# Altium PCB VL812 USB3.0 .PcbDoc (part 1 of 2)
Units mil, origin at the board's own origin, x right, y up, seen from the top; angles counter-clockwise.
Board outline 3076.06 x 1594.49 mil, 2 copper layers (TOP, BOTTOM), stack 60.4 mil thick; 108 components, 81 nets, 357 pads, 473 vias.
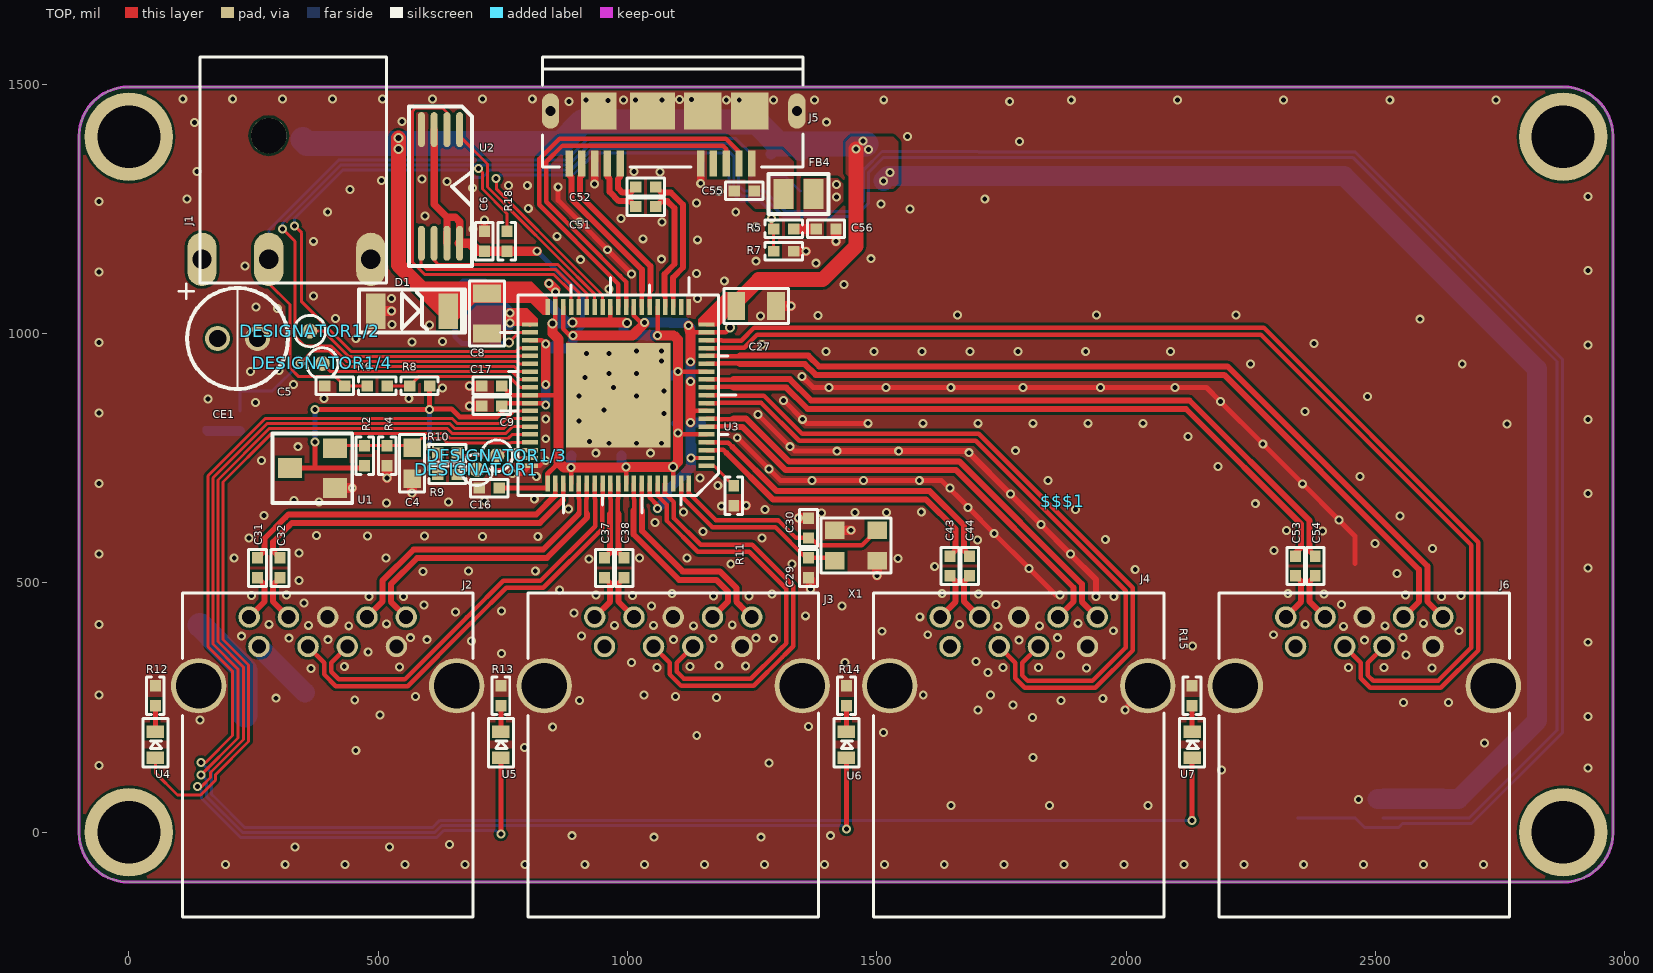
[diagram p0: TOP view]
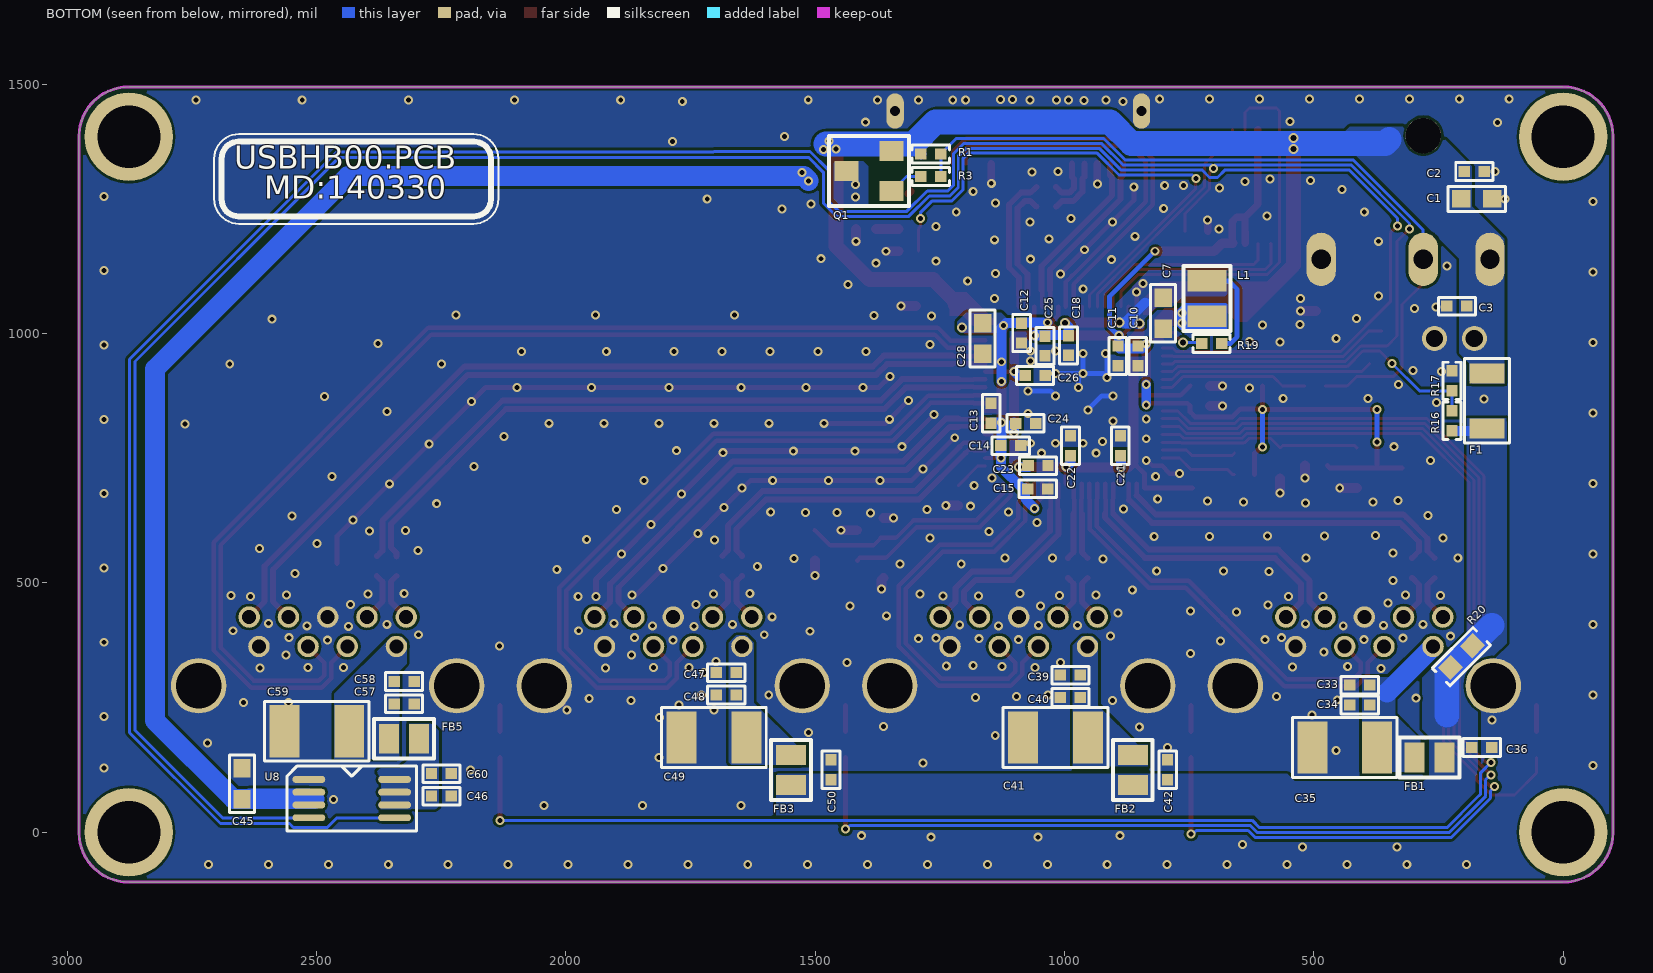
[diagram p1: BOTTOM view, seen from below]

## Layer stack, top to bottom
TOP: signal copper 1.2
Dielectric: dielectric 58, FR-4, Dk 1
BOTTOM: signal copper 1.2

## Board outline
-100,628.7 -100,1394.49 cw(c0,1394.49) 0,1494.49 171.06,1494.49 2876.06,1494.49 cw(c2876.06,1394.49) 2976.06,1394.49 2976.06,1278.7 2976.06,0 cw(c2876.06,0) 2876.06,-100 2671.06,-100 0,-100 cw(c0,0) -100,0 -100,143.7

## Design rules (kind name [scope] priority, off if disabled: settings)
Clearance "'Class' zsj rule_26" [InNetClass('USB3') And IsVia vs IsVia] p1: gap=12
Clearance "'Class' zsj rule_21" [InNetClass('USB2') And IsVia vs IsVia] p2: gap=12
Clearance "'Default' zsj rule_18" [All] p3: gap=5
Clearance "'Default' zsj rule_15" [IsVia vs IsVia] p4: gap=2
ComponentClearance "'Default' PADS rule_12" [All] p1: gap=2 collisioncheckmode=3 verticalgap=10 showdistances=FALSE
FlightTimeFalling "'Default' PADS rule_6" [All] p1: maximum=10.00
FlightTimeRising "'Default' PADS rule_5" [All] p1: maximum=10.00
Length "'Default' PADS rule" [All] p1: maxlimit=50000 minlimit=0
MatchedLengths "'Default' zsj  rule_7" [InNetClass('All Nets')] p1: tolerance=200 checknetsindiffpair=TRUE checkdiffpairvsdiffpair=TRUE checkothers=TRUE
MaxMinImpedance "'Default' PADS rule_4" [All] p1: minimum=50.00 maximum=150.0
MinimumSolderMaskSliver [All] p1: minsoldermaskwidth=5.04
ParallelSegment "'Default' zsj  rule_3" [All] p1: limit=1000 gap=200
ParallelSegment "'Default' zsj  rule_2" [All] p2: limit=1000 gap=200
PlaneClearance "'Class' zsj  rule_25" [InNetClass('USB3')] p1: clearance=5
PlaneClearance "'Class' zsj  rule_20" [InNetClass('USB2')] p2: clearance=5
PlaneClearance "'Net' zsj  rule_19" [InNetClass('Protel Created NetClass - 1')] p3: clearance=10
PlaneClearance "'Default' zsj  rule_14" [All] p4: clearance=8
PlaneConnect "Power Plane Connect Style - pads with no thermal" [(Name='J1-_')] p1: planeconnectstyle=NoConnect reliefexpansion=20 reliefentries=4 reliefconductorwidth=10 reliefairgap=10 // PAD - No Thermal Connect Rule
PlaneConnect "Power Plane Connect Style - from global settings" [All] p2: planeconnectstyle=Relief reliefexpansion=20 reliefentries=2 reliefconductorwidth=10 reliefairgap=10
PolygonConnect [All] p1: connectstyle=Direct reliefconductorwidth=10 reliefentries=4 polygonreliefangle="90 Angle"
RoutingLayers "'Default' zsj  rule_10" [All] p1: top layer_v5=TRUE bottom layer_v5=TRUE
RoutingPriority "'Default' zsj  rule_9" [All] p1: routingpriority=1
RoutingTopology "'Default' zsj  rule_8" [All] p1: topology=Shortest
RoutingVias "'Default' zsj rule_11" [All] p1: holewidth=12 width=20 viastyle="Through Hole" minholewidth=12 minwidth=20 maxholewidth=12 maxwidth=20
SMDToCorner "'Class' PADS rule_27" [InNetClass('USB3')] p1: distance=120000
SMDToCorner "'Class' PADS rule_22" [InNetClass('USB2')] p2: distance=120000
SMDToCorner "'Default' PADS rule_16" [All] p3: distance=20000
SMDToPlane "'Class' PADS rule_28" [InNetClass('USB3')] p1: distance=120000
SMDToPlane "'Class' PADS rule_23" [InNetClass('USB2')] p2: distance=120000
SMDToPlane "'Default' PADS rule_17" [All] p3: distance=20000
SilkToSilkClearance [All] p1: silktosilkclearance=0
SilkscreenOverComponentPads [IsPad] p1: minsilkscreentomaskgap=10
SolderMaskExpansion [All] p1: expansion=4
Width "'Class' zsj  rule_24" [InNetClass('USB3')] p1: maxlimit=12 minlimit=9 preferedwidth=12
Width "'Class' zsj  rule" [InNetClass('USB2')] p2: maxlimit=12 minlimit=9 preferedwidth=9
Width "'Net' zsj  rule" [InNetClass('Protel Created NetClass - 1')] p3: maxlimit=12 minlimit=9 preferedwidth=12
Width "'Default' zsj  rule_13" [All] p4: maxlimit=200 minlimit=5 preferedwidth=10
19 further rules are at their usual default settings.

## Classes and differential pairs
net class USB3: SSRX0+ SSRX0- SSRX1+ SSRX1- SSRX2+ SSRX2- SSRX3+ SSRX3- SSRX4+ SSRX4- SSTX0+ SSTX0+_E SSTX0- SSTX0-_E SSTX1+ SSTX1+_E SSTX1- SSTX1-_E SSTX2+ SSTX2+_E SSTX2- SSTX2-_E SSTX3+ SSTX3+_E SSTX3- SSTX3-_E SSTX4+ SSTX4+_E SSTX4- SSTX4-_E
net class USB2: USBDP+ USBDP- USBHP1+ USBHP1- USBHP2+ USBHP2- USBHP3+ USBHP3- USBHP4+ USBHP4-
net class "Protel Created NetClass - 1": SSRX0+ SSRX0- SSRX1+ SSRX1- SSRX2+ SSRX2- SSRX3+ SSRX3- SSRX4+ SSRX4- SSTX0+ SSTX0+_E SSTX0- SSTX0-_E SSTX1+ SSTX1+_E SSTX1- SSTX1-_E SSTX2+ SSTX2+_E SSTX2- SSTX2-_E SSTX3+ SSTX3+_E SSTX3- SSTX3-_E SSTX4+ SSTX4+_E SSTX4- SSTX4-_E USBDP+ USBDP- USBHP1+ USBHP1- USBHP2+ USBHP2- USBHP3+ USBHP3- USBHP4+ USBHP4-

## Components (designator, comment, footprint, x,y, rotation, side; value= is the part's Value field where it differs from the comment)
$$$1 "VIA_LABS_LOGO-5MM" VIA_LABS_LOGO-5MM 1872.95,665 r0 top
C1 "CAP0603/3" CAP0603/3 172.95,1270 r180 bottom
C2 "CAP0402/3" CAP0402/3 177.95,1325 r180 bottom
C3 "CAP0402/3" CAP0402/3 212.95,1055 r0 bottom
C4 "CAP0603" CAP0603 567.95,740 r90 top
C5 "CAP0402/2" CAP0402/2 412.95,895 r0 top
C6 "CAP0402" CAP0402 712.95,1185 r270 top
C7 "CAP0603/2" CAP0603/2 801.95,1041 r270 bottom
C8 "CAP0805/2" CAP0805/2 717.95,1040 r90 top
C9 "CAP0402/2" CAP0402/2 727.95,855 r0 top
C10 "CAP0402/4" CAP0402/4 852.95,955 r270 bottom
C11 "CAP0402/4" CAP0402/4 892.95,955 r270 bottom
C12 "CAP0402/4" CAP0402/4 1085.95,1001 r270 bottom
C13 "CAP0402/4" CAP0402/4 1146.95,840 r90 bottom
C14 "CAP0402/3" CAP0402/3 1107.95,775 r180 bottom
C15 "CAP0402/3" CAP0402/3 1053.74,688.7 r180 bottom
C16 "CAP0402/2" CAP0402/2 722.95,690 r0 top
C17 "CAP0402/2" CAP0402/2 727.95,895 r0 top
C18 "CAP0402/4" CAP0402/4 991.95,976 r270 bottom
C21 "CAP0402/4" CAP0402/4 887.95,775 r90 bottom
C22 "CAP0402/4" CAP0402/4 987.95,775 r90 bottom
C23 "CAP0402/3" CAP0402/3 1052.95,735 r180 bottom
C24 "CAP0402/3" CAP0402/3 1077.95,820 r180 bottom
C25 "CAP0402/4" CAP0402/4 1038.95,975 r270 bottom
C26 "CAP0402/3" CAP0402/3 1058.95,916 r180 bottom
C27 "CAP0805" CAP0805 1257.95,1055 r180 top
C28 "CAP0603/2" CAP0603/2 1163.95,990 r270 bottom
C29 "CAP0402" CAP0402 1362.95,530 r90 top
C30 "CAP0402" CAP0402 1362.95,610 r270 top
C31 "CAP0402" CAP0402 257.95,530 r270 top
C32 "CAP0402" CAP0402 302.95,530 r270 top
C33 "CAP0402/3" CAP0402/3 407.95,295 r0 bottom
C34 "CAP0402/3" CAP0402/3 407.95,255 r0 bottom
C35 "CAP1210" CAP1210 437.95,170 r0 bottom
C36 "CAP0402/3" CAP0402/3 162.95,170 r180 bottom
C37 "CAP0402" CAP0402 953.78,529.92 r270 top
C38 "CAP0402" CAP0402 993.15,529.92 r270 top
C39 "CAP0402/3" CAP0402/3 987.95,315 r0 bottom
C40 "CAP0402/3" CAP0402/3 987.95,270 r0 bottom
C41 "CAP1210" CAP1210 1017.95,190 r0 bottom
C42 "CAP0402/4" CAP0402/4 792.95,125 r90 bottom
C43 "CAP0402" CAP0402 1646.69,533.86 r270 top
C44 "CAP0402" CAP0402 1686.06,533.86 r270 top
C45 "CAP0603/2" CAP0603/2 2649.17,97.4 r90 bottom
C46 "CAP0402/3" CAP0402/3 2249.17,72.4 r180 bottom
C47 "CAP0402/3" CAP0402/3 1677.95,320 r0 bottom
C48 "CAP0402/3" CAP0402/3 1677.95,275 r0 bottom
C49 "CAP1210" CAP1210 1702.95,190 r0 bottom
C50 "CAP0402/4" CAP0402/4 1467.95,125 r90 bottom
C51 "CAP0402/2" CAP0402/2 1036.45,1254.33 r180 top
C52 "CAP0402/2" CAP0402/2 1036.45,1293.7 r180 top
C53 "CAP0402/2" CAP0402/2 2339.6,533.86 r270 top
C54 "CAP0402/2" CAP0402/2 2378.97,533.86 r270 top
C55 "CAP0402/2" CAP0402/2 1233.95,1286 r0 top
C56 "CAP0402/2" CAP0402/2 1397.95,1210 r180 top
C57 "CAP0402/3" CAP0402/3 2324.17,257.4 r180 bottom
C58 "CAP0402/3" CAP0402/3 2324.17,302.4 r180 bottom
C59 "CAP1210" CAP1210 2499.17,202.4 r0 bottom
C60 "CAP0402/3" CAP0402/3 2249.17,117.4 r180 bottom
CE1 "EC5X7-80" EC5X7-80 217.95,990 r0 top
D1 "D-MELF" D-MELF 567.95,1045 r180 top
DESIGNATOR1 "SMD_TP_1" SMD_TP_1 697.95,727 r135 top
DESIGNATOR1/2 "SMD_TP_1/2" SMD_TP_1/2 362.95,1005 r90 top
DESIGNATOR1/3 "SMD_TP_1/2" SMD_TP_1/2 737.95,755 r90 top
DESIGNATOR1/4 "SMD_TP_1/2" SMD_TP_1/2 387.95,940 r90 top
F1 "FUSE1206" FUSE1206 152.95,865 r270 bottom
FB1 "BEAD-CB-2012ES/3" BEAD-CB-2012ES/3 267.95,150 r0 bottom
FB2 "BEAD-CB-2012ES/2" BEAD-CB-2012ES/2 862.95,125 r90 bottom
FB3 "BEAD-CB-2012ES/2" BEAD-CB-2012ES/2 1547.95,125 r90 bottom
FB4 "BEAD-CB-2012ES" BEAD-CB-2012ES 1342.95,1280 r0 top
FB5 "BEAD-CB-2012ES/3" BEAD-CB-2012ES/3 2324.17,187.4 r0 bottom
J1 "DCJACK-IDJ-D22-6T" DCJACK-IDJ-D22-6T 328.74,1328.35 r0 top
J2 "USB-UEA11123-4HK1-4H" USB-UEA11123-4HK1-4H 398.66,293.7 r0 top locked
J3 "USB-UEA11123-4HK1-4H" USB-UEA11123-4HK1-4H 1091.57,293.7 r0 top locked
J4 "USB-UEA11123-4HK1-4H" USB-UEA11123-4HK1-4H 1784.49,293.7 r0 top locked
J5 "MICROUSB-B-S_D" MICROUSB-B-S_D 1090.19,1432.48 r180 top
J6 "USB-UEA11123-4HK1-4H/2" USB-UEA11123-4HK1-4H/2 2477.4,293.7 r0 top locked
L1 "L-ZAD2512" L-ZAD2512 713.95,1070 r270 bottom
Q1 "SOT23-GDS" SOT23-GDS 1391.95,1326 r270 bottom
R1 "RES0402/3" RES0402/3 1267.95,1360 r0 bottom
R2 "RES0402/2" RES0402/2 472.95,755 r90 top
R3 "RES0402/3" RES0402/3 1267.95,1315 r0 bottom
R4 "RES0402/2" RES0402/2 517.95,755 r270 top
R5 "RES0402" RES0402 1312.95,1210 r180 top
R6 "RES0402" RES0402 497.95,895 r0 top
R7 "RES0402" RES0402 1312.95,1165 r0 top
R8 "RES0402" RES0402 582.95,895 r180 top
R9 "RES0402" RES0402 638.95,717 r0 top
R10 "RES0402" RES0402 638.95,760 r0 top
R11 "RES0402/2" RES0402/2 1212.95,675 r270 top
R12 "RES0402" RES0402 53.15,273.7 r90 top
R13 "RES0402/2" RES0402/2 746.06,273.7 r90 top
R14 "RES0402/2" RES0402/2 1438.97,273.7 r90 top
R15 "RES0402" RES0402 2131.89,273.7 r90 top
R16 "RES0402/4" RES0402/4 222.95,825 r270 bottom
R17 "RES0402/4" RES0402/4 222.95,905 r90 bottom
R18 "RES0402/2" RES0402/2 757.95,1185 r90 top
R19 "RES0402/3" RES0402/3 704.95,980 r0 bottom
R20 "RES0603" RES0603 203.95,352 r315 bottom
U1 "SOT23-132" SOT23-132 367.95,730 r90 top
U2 "TSSOP8-25P6X228" TSSOP8-25P6X228 624.95,1295 r180 top
U3 "QFN76-15P7-TH" QFN76-15P7-TH 981.34,876.38 r90 top locked
U4 "LED-LT8A23-51-UR96-T5" LED-LT8A23-51-UR96-T5 53.15,175.59 r90 top
U5 "LED-LT8A23-51-UR96-T5" LED-LT8A23-51-UR96-T5 746.06,175.59 r90 top
U6 "LED-LT8A23-51-UR96-T5" LED-LT8A23-51-UR96-T5 1438.97,175.59 r90 top
U7 "LED-LT8A23-51-UR96-T5" LED-LT8A23-51-UR96-T5 2131.89,175.59 r90 top
U8 "MSOP8-25P6X172" MSOP8-25P6X172 2429.17,67.4 r90 bottom
X1 "OSC4-085X061" OSC4-085X061 1457.95,575 r0 top

## Footprints (in the part's own frame and the unit in brackets; to place one, negate y for a bottom-side part, rotate by r counter-clockwise, add the part's x,y. Pads: shape width x height; smd on the part's side, far side on the other; paste and mask are expansions set on the pad)
BEAD-CB-2012ES [mil]
  rect 40x60 smd: 1(-30,0) 2(30,0)
  silkscreen extent -60,-40 60,40
BEAD-CB-2012ES/2 [mil]
  rect 40x60 smd: 1(30,0) 2(-30,0)
  silkscreen extent -60,-40 60,40
BEAD-CB-2012ES/3 [mil]
  rect 40x60 smd: 1(30,0) 2(-30,0)
  silkscreen extent -60,-40 60,40
CAP0402 [mil]
  rect 23x22 smd: 1(-20,0) 2(20,0)
  silkscreen extent -37,-18 37,18
CAP0402/2 [mil]
  rect 23x22 smd: 1(-20,0) 2(20,0)
  silkscreen extent -37,-18 37,18
CAP0402/3 [mil]
  rect 23x22 smd: 1(20,0) 2(-20,0)
  silkscreen extent -37,-18 37,18
CAP0402/4 [mil]
  rect 23x22 smd: 1(20,0) 2(-20,0)
  silkscreen extent -37,-18 37,18
CAP0603 [mil]
  rect 37x35 smd: 1(-31,0) 2(31,0)
  silkscreen extent -58,-25 58,25
CAP0603/2 [mil]
  rect 37x35 smd: 1(31,0) 2(-31,0)
  silkscreen extent -58,-25 58,25
CAP0603/3 [mil]
  rect 37x35 smd: 1(31,0) 2(-31,0)
  silkscreen extent -58,-25 58,25
CAP0805 [mil]
  rect 36x56 smd: 1(-40,0) 2(40,0)
  silkscreen extent -65,-35 65,35
CAP0805/2 [mil]
  rect 36x56 smd: 1(-40,0) 2(40,0)
  silkscreen extent -65,-35 65,35
CAP1210 [mil]
  rect 60x105 smd: 1(65,0) 2(-65,0)
  silkscreen extent -105,-60 105,60
D-MELF [mm]
  rect 1x1.8 smd: A(1.85,0) K(-1.85,0)
  silkscreen extent -2.7,-1.1 2.7,1.1
DCJACK-IDJ-D22-6T [mil]
  oval 59x107 hole 39: 1(-182.08,-179.63) 2(-48.23,-179.63) 3(156.49,-179.63)
  round 71 hole 71: _(-48.23,68.4)
  silkscreen extent -186,-227 188,226
EC5X7-80 [mil]
  round 50 hole 35: 1(-40,0) 2(40,0)
  silkscreen extent -101,-101 101,101
FUSE1206 [mil]
  rect 40x70 smd: 1(55,0) 2(-55,0)
  silkscreen extent -85,-45 85,45
L-ZAD2512 [mm]
  rect 1.1x2 smd: 1(0.9,0) 2(-0.9,0)
  silkscreen extent -1.65,-1.2 1.65,1.2
LED-LT8A23-51-UR96-T5 [mil]
  rect 25x35 smd: 1(-26.18,0) 2(26.18,0)
  silkscreen extent -45,-25 53,25
MICROUSB-B-S_D [mil]
  rect 15x53 smd: 1(-158.86,91.53) 2(-133.27,91.53) 3(-107.68,91.53) 4(-82.09,91.53) 5(-56.5,91.53) 6(104.92,91.53) 7(130.51,91.53) 8(156.1,91.53) 9(181.69,91.53) 10(207.28,91.53)
  oval 35x71 hole 20: G1(-249.41,-13.78) G2(244.68,-13.78)
  rect 75x75 smd: G3(-154.92,-13.78) G4(-60.43,-13.78)
  rect 90x75 smd: G5(39.96,-13.78)
  rect 71x75 smd: G6(148.23,-13.78)
  silkscreen extent -261,-122 261,98
MSOP8-25P6X172 [mil]
  oval 14x66 smd: 1(38.39,86.02) 2(12.8,86.02) 3(-12.79,86.02) 4(-38.39,86.02) 5(-38.39,-86.02) 6(-12.79,-86.02) 7(12.8,-86.02) 8(38.39,-86.02)
  silkscreen extent -65,-130 65,130
OSC4-085X061 [mil]
  rect 39x35 smd: 1(-42.32,-30.51) 2(42.32,-30.51) 3(42.32,30.51) 4(-42.32,30.51)
  silkscreen extent -70,-55 70,55
QFN76-15P7-TH [mil]
  rect 9x32 smd: 1(-141.73,-177.17) 2(-125.98,-177.17) 3(-110.24,-177.17) 4(-94.49,-177.17) 5(-78.74,-177.17) 6(-62.99,-177.17) 7(-47.24,-177.17) 8(-31.5,-177.17) 9(-15.75,-177.17) 10(0,-177.17) 11(15.75,-177.17) 12(31.5,-177.17) 13(47.24,-177.17) 14(62.99,-177.17) 15(78.74,-177.17) 16(94.49,-177.17) 17(110.24,-177.17) 18(125.98,-177.17) 19(141.73,-177.17) 39(141.73,177.16) 40(125.98,177.16) 41(110.24,177.16) 42(94.49,177.16) 43(78.74,177.16) 44(62.99,177.16) 45(47.24,177.16) 46(31.5,177.16) 47(15.75,177.16) 48(0,177.16) 49(-15.75,177.16) 50(-31.5,177.16) 51(-47.24,177.16) 52(-62.99,177.16) 53(-78.74,177.16) 54(-94.49,177.16) 55(-110.24,177.16) 56(-125.98,177.16) 57(-141.73,177.16)
  rect 32x9 smd: 20(177.16,-141.73) 21(177.16,-125.98) 22(177.16,-110.24) 23(177.16,-94.49) 24(177.16,-78.74) 25(177.16,-62.99) 26(177.16,-47.24) 27(177.16,-31.5) 28(177.16,-15.75) 29(177.16,0) 30(177.16,15.75) 31(177.16,31.5) 32(177.16,47.24) 33(177.16,62.99) 34(177.16,78.74) 35(177.16,94.49) 36(177.16,110.24) 37(177.16,125.98) 38(177.16,141.73) 58(-177.17,141.73) 59(-177.17,125.98) 60(-177.17,110.24) 61(-177.17,94.49) 62(-177.17,78.74) 63(-177.17,62.99) 64(-177.17,47.24) 65(-177.17,31.5) 66(-177.17,15.75) 67(-177.17,0) 68(-177.17,-15.75) 69(-177.17,-31.5) 70(-177.17,-47.24) 71(-177.17,-62.99) 72(-177.17,-78.74) 73(-177.17,-94.49) 74(-177.17,-110.24) 75(-177.17,-125.98) 76(-177.17,-141.73)
  rect 210x210 smd: G1(0,0)
  silkscreen extent -236,-236 236,236
RES0402 [mil]
  rect 23x22 smd: 1(-20,0) 2(20,0)
  silkscreen extent -37,-18 37,18
RES0402/2 [mil]
  rect 23x22 smd: 1(-20,0) 2(20,0)
  silkscreen extent -37,-18 37,18
RES0402/3 [mil]
  rect 23x22 smd: 1(20,0) 2(-20,0)
  silkscreen extent -37,-18 37,18
RES0402/4 [mil]
  rect 23x22 smd: 1(20,0) 2(-20,0)
  silkscreen extent -37,-18 37,18
RES0603 [mil]
  rect 37x35 smd: 1(31,0) 2(-31,0)
  silkscreen extent -57,-25 57,25
SMD_TP_1 [mil]
  round 30 smd: 1(0,0)
  silkscreen extent -32,-29 32,32
SMD_TP_1/2 [mil]
  round 30 smd: 1(0,0)
  silkscreen extent -32,-32 32,32
SOT23-132 [mil]
  rect 40x48 smd: 1(-40,-45) 2(40,-45) 3(0,45)
  silkscreen extent -70,-80 70,80
SOT23-GDS [mil]
  rect 40x48 smd: D(0,-45) G(40,45) S(-40,45)
  silkscreen extent -70,-80 70,80
TSSOP8-25P6X228 [mil]
  oval 14x70 smd: 1(-38.43,-114) 2(-12.83,-114) 3(12.77,-114) 4(38.37,-114) 5(38.37,114) 6(12.77,114) 7(-12.83,114) 8(-38.43,114)
  silkscreen extent -63,-160 63,160
USB-UEA11123-4HK1-4H [mil]
  round 43 hole 28: 1(-137.79,78.74) 2(-39.37,78.74) 3(39.37,78.74) 4(137.8,78.74) 5(157.48,137.79) 6(78.74,137.79) 7(0,137.79) 8(-78.74,137.79) 9(-157.48,137.79)
  round 111 hole 91: G1(-258.66,0) G2(258.66,0)
  silkscreen extent -291,-464 291,186
USB-UEA11123-4HK1-4H/2 [mil]
  round 43 hole 28: 1(-137.8,78.74) 2(-39.37,78.74) 3(39.37,78.74) 4(137.79,78.74) 5(157.48,137.79) 6(78.74,137.79) 7(0,137.79) 8(-78.74,137.79) 9(-157.48,137.79)
  round 111 hole 91: G1(-258.66,0) G2(258.66,0)
  silkscreen extent -291,-464 291,186
VIA_LABS_LOGO-5MM [mil]

## Free pads (board coordinates)
  round 177.17 hole 125.98: 0(0,0) 0(0,1394.49) 0(2876.06,0) 0(2876.06,1394.49)

## Via types
v1: diameter 18/18 (per signal layer), hole 9.84, TOP to BOTTOM, 423 vias
v2: diameter 18/18 (per signal layer), hole 10, TOP to BOTTOM, 42 vias
v3: diameter 20/20 (per signal layer), hole 12, TOP to BOTTOM, 8 vias

## Nets (pads, with @x,y where several pads share a name; then routed paths per layer and width w, separated by ;. In a path a pad name is that pad's centre, name@x,y a point inside that pad or via, vN(x,y) a via of type N, cw(c..) or ccw(c..) an arc to the next point about the centre after c; other vN are vias at no path point)
1_2V: C7.2 C16.2 C17.2 C18.2 C21.2 C22.2 C23.2 C24.2 C25.2 C26.2 L1.2 R19.2 U3.5 U3.13 U3.24 U3.30 U3.37 U3.48 U3.58 U3.61 U3.68 U3.74 | length 2164.5
  TOP w9: C17.2@747.95,895 766.57,876.38 U3.48@804.17,876.38 860.72,876.38 ; v3(849.95,1020) 855.35,1025.4 U3.37@855.35,1053.54 v2(855.15,1083.2) ; U3.61@886.85,699.21 v2(886.85,731) ; 965.59,1022.64 U3.30@965.59,1053.54 ; U3.68@997.09,699.21 v2(997.09,732) ; v2(1060.08,996.38) U3.24@1060.08,1053.54 ; U3.74@1091.57,699.21 v3(1091.57,732.38) ; v2(1101.34,801) v2@1108.7,797.64 ; v2@1101.34,805 v2@1108.7,797.64 ; v2(1101.34,923.62) U3.13@1158.5,923.62 ; U3.5@1158.5,797.64 v2@1108.7,797.64
  TOP w10: C16.2@742.95,690 839.61,690 U3.58@839.61,699.21 839.61,718.65 855.95,735 ; 861.34,742.61 855.95,735 ; 868.95,735 855.95,735
  TOP w18: v2(855.15,1083.2) v2@855.15,1088.3
  TOP w18.24: 860.72,876.38 861.34,877
  TOP w18.72: 964.95,1022 965.59,1022.64
  TOP w20: v2(842.95,1100.5) v2@855.15,1088.3 ; v3(849.95,1020) 849.95,1000.36 860.95,989.36 861.34,988.61 861.34,877 861.34,742.61 868.95,735 872.95,731 v2(886.85,731) 996.09,731 v2(997.09,732) 1031.94,732.14 v3(1091.57,732.38) 1101.34,742.14 v2(1101.34,801) 1101.34,805 v2(1101.34,923.62) 1101.34,987.59 1092.55,996.38 v2(1060.08,996.38) ; v3(889.95,1022) 964.95,1022 v3@994.95,1022 ; v3@994.95,1022 995.57,1021.38 v3(998.95,1021.38) v3@994.95,1022
  BOTTOM w10: R19.2@684.95,980 667.44,980 653.74,993.7 653.74,1088.7 670.47,1105.43 L1.2@713.95,1105.43
  BOTTOM w18: v2@996.09,732 v2(997.09,732)
  BOTTOM w18.47: v2@1100.57,923.62 v2(1101.34,923.62)
  BOTTOM w20: 837.95,1062 877.95,1022 ; v3(849.95,1020) 875.95,1020 877.95,1022 ; v2(886.85,731) 886.85,751.1 C21.2@887.95,755 ; v3(889.95,1022) 877.95,1022 ; C22.2@987.95,755 987.95,740.13 v2@996.09,732 ; v3(998.95,1021.38) 991.95,1014.38 C18.2@991.95,996 992.83,996.87 C25.2@1038.95,996.87 ; C23.2@1071.95,732 1073.01,732.02 1078.01,732.12 v3(1091.57,732.38) ; C26.2@1078.95,916 1092.95,916 v2@1100.57,923.62 ; C24.2@1097.95,820 1101.34,821.61 v2(1101.34,801) ; C25.2@1038.95,996.87 C25.2@1038.95,995 v2(1060.08,996.38) 1059.58,996.87 C25.2@1038.95,996.87
3_3V: C6.2 C9.2 C10.2 C11.2 C12.2 C13.2 C14.2 C15.2 C28.2 R2.1 R8.1 R9.1 R10.1 R18.1 U1.3 U2.3 U2.7 U2.8 U3.2 U3.8 U3.18 U3.27 U3.36 U3.41 U3.49 U3.71 | length 3058.3
  TOP w9: C9.2@747.95,855 753.58,860.63 U3.49@804.17,860.63 829.32,860.63 v2(835.95,857) ; U3.41@804.17,986.61 828.34,986.61 v2(835.95,979) ; U3.36@871.1,1053.54 871.1,1009.23 v2@883.33,997 ; v2@889.56,997 v2@883.33,997 ; v2@890.13,996.43 v2@883.33,997 ; v2(890.17,996.39) v2@883.33,997 ; v2(890.17,996.39) v2@890.56,996.39 ; U3.27@1012.83,1053.54 1012.83,1035.35 v2@1026.19,1022 ; v2@1033.95,1020 1033.47,1020.12 v2@1026.19,1022 ; v2(1033.95,1022) v2@1026.19,1022 ; U3.71@1044.33,699.21 1044.33,671.02 1059.72,655.63 v2(1059.72,649.27) ; v2@1123.13,1011.69 1130.95,1003.87 1130.95,1002.36 U3.18@1158.5,1002.36 1197.31,1002.36 1204.95,1010 v3(1204.95,1012) ; 1126.34,835 1136.22,844.88 U3.8@1158.5,844.88 ; v2(1126.95,750) U3.2@1158.5,750.39
  TOP w10: U1.3@322.95,730 372.95,730 ; v2(372.95,782.5) 372.95,730 ; v2(372.95,847.5) 373.45,848 v2(602.95,848) R8.1@602.95,895 ; R2.1@472.95,735 467.95,730 372.95,730 ; v2(602.95,772.5) 605.45,772.5 617.95,760 R10.1@618.95,760 R9.1@618.95,717 ; v2@608.67,848.7 647.25,848.7 662.95,833 738.04,833 747.95,842.91 C9.2@747.95,855
  TOP w15: U2.3@612.18,1409 612.18,1258.77 637.95,1233 ; U2.7@637.78,1181 637.95,1233 ; U2.8@663.38,1181 663.38,1224.57 654.95,1233 637.95,1233
  TOP w17.65: v2@889.56,997 890.28,996.56 v2@890.56,996.39
  TOP w18: v2@1033.95,1020 v2(1033.95,1022)
  TOP w18.27: v2@889.56,997 890.13,996.43 v2(890.17,996.39)
  TOP w20: U2.8@663.38,1181 683.95,1181 699.95,1165 C6.2@712.95,1165 R18.1@757.95,1165 v2(817.95,1165) ; v2(835.95,898) v2(835.95,979) ; v2(890.17,996.39) 890.56,996.39 1010.33,996.38 v2@1033.95,1020 ; v2(1121.95,1016) 1123.13,1011.69 1126.34,1000 v2(1126.34,943.39) ; v2(1126.34,822) 1126.34,835 v2(1126.34,904.12)
  BOTTOM w10: v2(372.95,782.5) v2(372.95,847.5) ; v2(602.95,772.5) v2(602.95,848) ; v2(817.95,1165) 818.95,1165 909.95,1074 909.95,1013.71 898.24,1002 ; v2@890.78,997 v2@890.91,997 ; v2@890.91,997 v2@891.05,997 ; v2@890.91,997 v2(890.17,996.39) v2@891.05,997 ; v2@890.91,997 v2@896.95,1002 ; v2@891.05,997 v2@894.01,999.06 ; v2@891.05,997 891.95,997 v2@894.01,999.06 ; v2@894.01,999.06 898.24,1002 ; v2@894.01,999.06 v2@896.95,1002 ; v2@896.95,1002 898.24,1002
  BOTTOM w16.23: v2(890.17,996.39) v2@891.95,997
  BOTTOM w18: v2(835.95,857) v2@835.95,858
  BOTTOM w18.27: v2(890.17,996.39) v2@890.78,997
  BOTTOM w20: v2@835.95,858 v2(835.95,898) ; v2(835.95,979) C10.2@844.95,970 ; C11.2@889.95,975.03 v2(890.17,996.39) ; v2(1033.95,1022) 1049.72,1022 1085.95,1022.01 C12.2@1085.95,1021 1116.95,1021 v2(1121.95,1016) 1126.34,1011.61 v2(1126.34,943.39) v2(1126.34,904.12) ; v2(1059.72,649.27) 1077.23,666.78 1078.95,671.58 1078.95,690 1084.95,690 1126.95,732 v2(1126.95,750) ; C10.2@844.95,970 C10.2@852.95,975 C10.2@852.95,970 ; C10.2@844.95,970 C10.2@852.95,970 ; C10.2@852.95,970 C11.2@889.48,970 ; C11.2@889.48,970 C11.2@892.95,975 889.95,975 C11.2@889.48,970 ; v2@1126.34,755.34 v2@1126.95,751.39 ; v2@1126.34,755.34 v2@1127.95,753.73 ; v2@1126.34,755.34 v2(1126.95,750) ; v2@1126.34,755.34 v2@1127.63,752.98 ; v2@1126.34,755.34 C14.2@1126.34,775 ; C14.2@1126.34,775 C14.2@1127.95,775 v2@1127.95,753.73 ; C14.2@1126.34,775 v2(1126.34,822) C13.2@1142.16,822 ; v2(1126.95,750) v2@1127.95,752.39 ; v2(1126.95,750) v2@1126.95,751.39 ; v2(1126.95,750) v2@1127.46,751.9 ; v2@1126.95,751.39 v2@1127.46,751.9 ; v2@1126.95,751.39 v2@1127.63,752.98 ; v2@1127.46,751.9 v2@1127.95,752.39 ; v2@1127.46,751.9 v2@1127.71,752.83 ; v2@1127.63,752.98 v2@1127.71,752.83 ; v2@1127.63,752.98 v2@1127.95,753.73 ; v2@1127.71,752.83 v2@1127.95,752.39 ; v2@1127.71,752.83 v2@1127.95,753.73 ; v2@1127.95,752.39 v2@1127.95,753.73 ; C13.2@1142.16,822 C13.2@1146.95,820 1146.68,821.27 C13.2@1142.16,822
5VBUS: C56.2 FB4.2 Q1.D R5.1 | length 45
  TOP w20: R5.1@1332.95,1210 C56.2@1377.95,1210
  other v1: 1418.74,1273.7 1418.74,1298.7
ADAPTERIN: C1.2 C2.2 C3.2 C8.2 C27.2 C45.2 CE1.1 D1.K F1.2 J1.1 Q1.S R1.1 U3.19 U3.38 U8.2 U8.3 | length 5493.9
  TOP w9: U3.19@1158.5,1018.11 1181.06,1018.11 C27.2@1217.95,1055
  TOP w30: v3(540.45,1391.99) v3(540.95,1370) 540.45,1137.5 602.95,1075 ; v2(1457.95,1370) 1457.95,1175 1390.95,1108 1262.95,1108 C27.2@1222.95,1068 ; C27.2@1222.95,1068 1217.95,1068 C27.2@1217.95,1055 C27.2@1222.95,1068
  BOTTOM w6: 529.22,1380.76 534.3,1385.84 v3@536.46,1388 ; v3(540.95,1370) 540.95,1372 540.73,1380.76 v3(540.45,1391.99) ; v3@535.19,1388 540.95,1393.76 v3(540.45,1391.99) ; v3@535.19,1388 535.78,1388.02 v3@536.51,1388.05 ; v3@535.19,1388 535.75,1388 v3@536.46,1388 ; v3@536.46,1388 v3@536.51,1388.05 ; v3@536.46,1388 v3@536.57,1388 ; v3@536.51,1388.05 v3@536.57,1388 ; v3@536.51,1388.05 538.34,1389.88 v3(540.45,1391.99) ; v3@536.57,1388 538.22,1389.7 v3(540.45,1391.99)
  BOTTOM w14: 2504.17,66.4 U8.2@2515.19,80.2
  BOTTOM w14.97: v3@534.72,1386.85 v3@535.75,1388 ; v3@535.78,1388.02 539.85,1392.54 v3@540.95,1393.76
  BOTTOM w15: U8.3@2515.19,54.61 C45.2@2637.38,54.61 ; U8.2@2515.19,80.2 2635.38,80.2 C45.2@2649.17,66.4
  BOTTOM w16.41: 2504.17,66.4 U8.3@2515.19,54.61 ; C45.2@2637.38,54.61 C45.2@2649.17,66.4
  BOTTOM w18: v2(1471.95,1386) v2@1478.19,1380 ; v2(1512.95,1306) v2@1521.99,1316
  BOTTOM w18.65: 532.19,1380.76 538.22,1389.7 538.34,1389.88 539.98,1392.31 v3@540.95,1393.76
  BOTTOM w20: 529.22,1380.76 529.73,1380.29 v3(540.95,1370) ; R1.1@1287.95,1360 R1.1@1293.95,1366 ; 1302.95,1380 R1.1@1293.95,1366 ; v2@1478.19,1380 1468.19,1370 v2(1457.95,1370) 1453.95,1366 Q1.S@1346.95,1366 R1.1@1293.95,1366
  BOTTOM w20.71: 529.22,1380.76 531.05,1379.39 536.8,1375.09 v3@540.95,1372
  BOTTOM w20.88: v2@1453.95,1366 1455.31,1370.75 1457.95,1380
  BOTTOM w21.37: 1457.95,1380 1462.12,1375.93 1462.95,1375.12 1468.19,1370
  BOTTOM w22: R1.1@1287.95,1360 1302.95,1380
  BOTTOM w22.11: 532.19,1380.76 v3(540.45,1391.99)
  BOTTOM w22.26: 532.19,1380.76 536.8,1375.09 v3(540.95,1370)
  BOTTOM w23.91: v2@1521.99,1316 v2(1525.95,1323)
  BOTTOM w25.23: 532.19,1380.76 v3@540.95,1372
  BOTTOM w26.03: v2@1478.19,1380 v2(1482.95,1369)
  BOTTOM w29.36: 529.22,1380.76 529.79,1381.32 534.25,1385.72 v3@536.57,1388
  BOTTOM w30: v2(1457.95,1370) 1457.95,1380
  BOTTOM w31.22: 529.22,1380.76 534.25,1386.85 v3@535.19,1388
  BOTTOM w33.08: 532.19,1380.76 v3@536.57,1388
  BOTTOM w34.32: 532.19,1380.76 534.25,1385.72 534.3,1385.84 534.72,1386.85 v3@535.19,1388
  BOTTOM w40: Q1.S@1346.95,1366 Q1.S@1346.95,1380 ; v2(1512.95,1306) 1512.95,1306.97 1521.99,1316 2436.44,1316 2823.74,928.7 2823.74,223.7 2666.44,66.4 C45.2@2649.17,66.4 2504.17,66.4
  BOTTOM w50: 348.74,1388.7 356.68,1380.76 529.22,1380.76 532.19,1380.76 540.73,1380.76 865.19,1380.76 908.43,1424 1258.95,1424 1302.95,1380 1346.95,1380 1457.95,1380 v2@1478.19,1380
ADINDET: C5.2 J1.2 R1.2 R3.2 R6.1 | length 1565.7
  TOP w6: J1.2@280.55,1148.03 280.55,1100.4 322.95,1058 322.95,931 340.45,913.5 414.45,913.5 C5.2@432.95,895 R6.1@477.95,895
  BOTTOM w6: J1.2@280.55,1148.03 280.55,1207.6 421.21,1348.26 878.65,1348.26 921.89,1391.5 1216.45,1391.5 R1.2@1247.95,1360 R3.2@1247.95,1315
AMB2: U2.5 U3.34 | length 410.3
  TOP w6: U2.5@586.58,1181 585.95,1180.37 585.95,1140 597.95,1128 856.52,1128 902.6,1081.92 U3.34@902.6,1053.54
AMB3: U2.6 U3.33 | length 394.7
  TOP w6: U2.6@612.18,1181 612.18,1146.77 620.95,1138 860.67,1138 918.35,1080.32 U3.33@918.35,1053.54
AMB4: U2.1 U3.32 | length 467.5
  TOP w6: U2.1@663.38,1409 663.38,1395.57 718.95,1340 718.95,1294 803.67,1209.28 830.45,1182.5 861.52,1151.29 934.09,1078.72 U3.32@934.09,1053.54
COREPWRDN: DESIGNATOR1/4.1 U3.46 | length 429.5
  TOP w6: DESIGNATOR1/4.1@387.95,940 404.45,923.5 768.6,923.5 784.22,907.87 U3.46@804.17,907.87